# Altium PCB PCB1_DEC24.pcbdoc (part 2 of 2)
Units mil, origin at the board's own origin, x right, y up, seen from the top; angles counter-clockwise.
Board outline 3300 x 2250 mil, 2 copper layers (Top Layer, Bottom Layer); 80 components, 60 nets, 287 pads, 191 vias.
Unrouted connection lines stored in the file: 6.
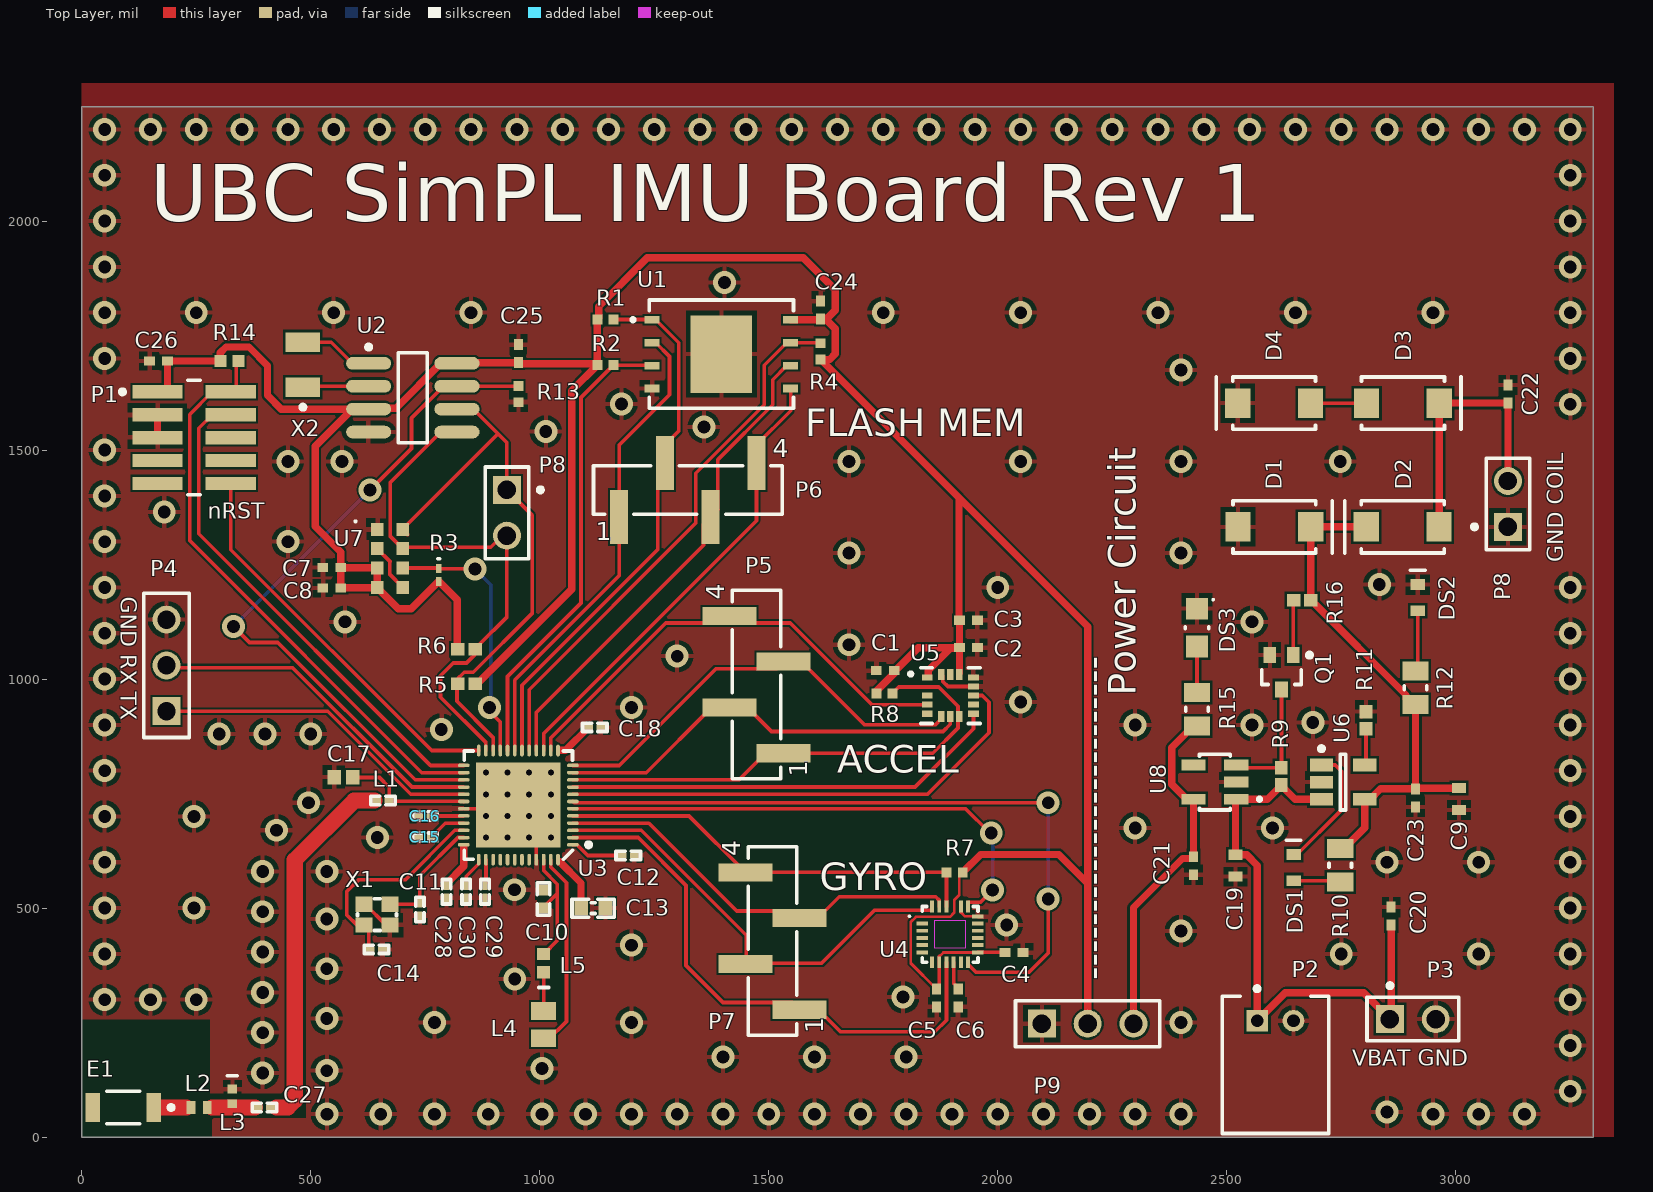
[diagram p0: Top Layer view]

## Via types
v1: diameter 50, hole 28, Top Layer to Bottom Layer, 175 vias
v2: diameter 25.98, hole 12.99, Top Layer to Bottom Layer, 16 vias

## Nets (pads, with @x,y where several pads share a name; then routed paths per layer and width w, separated by ;. In a path a pad name is that pad's centre, name@x,y a point inside that pad or via, vN(x,y) a via of type N, cw(c..) or ccw(c..) an arc to the next point about the centre after c; other vN are vias at no path point) (continued)
I2C_SDA: (continued)
  Top Layer w8: U7.7@700.34,1285.23 673.22,1312.35 673.22,1428.91 U2.5@783.75,1539.44 ; U7.7@700.44,1285.23 U7.7 U7.7@703.68,1287.98 ; U7.7@703.59,1287.98 U7.7@703.68,1287.98 ; 783.22,960.54 882.35,861.41 U3.23 ; 783.31,960.54 783.31,1007 811.31,1035 840,1035 858.7,1053.7 R6.1 ; U2.5@783.84,1539.44 U2.5 U2.5@819.28,1539.44 ; R6.1@867.01,1074.42 928.22,1135.63 928.22,1313.04 918.23,1313.04 893.16,1287.98 U7.7@703.68,1287.98
IR_INT: R3.1 U3.21 U7.6 | length 578.3
  Top Layer w8: U7.6@700.34,1242.41 U7.6 R3.1@777.98,1242.41 ; R3.1@778.07,1242.41 R3.1 ; R3.1@779.38,1241.01 R3.1 ; v1@857.75,1241.01 R3.1 ; v1@857.84,1241.01 v1@858.31,1240.54 ; v1@893.22,926.98 v1@893.22,938.04 ; v1@893.31,926.98 913.94,906.35 ; U3.21 913.85,906.35
  Bottom Layer w8: v1(858.22,1240.54) 893.22,1205.54 v1@893.22,938.04
  other v1: 890,938.04
MEM_CS: P6.2 R1.1 U1.1 U3.18 | length 1165.3
  Top Layer w8: U3.18 961.09,986.64 1257.53,1283.08 P6.2@1257.53,1456.41 ; R1.1@1160.93,1785.54 1161.45,1785.03 1244.49,1785.03 U1.1 ; U1.1@1253.27,1784.52 1303.22,1734.57 1303.22,1541.47 ; P6.2 P6.2@1273.22,1511.47 ; P6.2@1273.31,1511.47 1303.31,1541.47
MEM_MISO: P6.4 U1.5 U3.15 | length 1022.3
  Top Layer w8: U3.15 1008.34,880.66 1473.22,1345.54 P6.4 1473.22,1511.47 1547.76,1586.01 ; U1.5@1539.58,1634.52 1547.85,1634.52 1547.85,1586.01
MEM_MOSI: P6.1 U1.2 U3.19 | length 1051.2
  Top Layer w8: U3.19 945.34,997.77 1173.22,1225.64 P6.1 1173.22,1510.54 1283.22,1620.54 1283.22,1704.57 1253.27,1734.52 U1.2
MEM_SCLK: P6.3 U1.6 U3.16 | length 1075.4
  Top Layer w8: U3.16 992.59,927.41 1357.53,1292.36 P6.3@1357.53,1338.3 ; P6.3@1357.63,1338.3 P6.3@1389,1369.67 ; P6.3@1388.9,1369.67 1388.9,1479.25 1508.39,1598.73 1508.39,1653.42 U1.6@1539.49,1684.52 ; U1.6@1539.58,1684.52 U1.6 U1.6@1547.85,1684.52
MEM_SPI_HOLD: R4.1 U1.7 U3.17 | length 1197.4
  Top Layer w8: U3.17 976.84,976.84 1340.77,1340.77 1340.77,1449.5 1490,1598.73 1490,1685.03 1539.49,1734.52 U1.7 R4.1@1613.22,1734.52
MEM_SPI_W: R2.1 U1.3 U3.20 | length 1021.9
  Top Layer w8: U3.20 929.6,1005.49 1090.02,1165.92 1090.02,1614.63 1160.93,1685.54 1161.45,1685.03 1244.49,1685.03 U1.3
NetC6_1: C6.1 U4.10 | length 62.8
  Top Layer w8: 1903.59,335.13 U4.10@1903.59,381.78 ; 1903.69,335.13 1913.69,325.13 C6.1
NetC17_2: C17.2 L1.1 U3.30 | length 283.2
  Top Layer w8: C17.2@591.31,785 650.04,785 671.08,763.96 L1.1@671.08,734.85 ; L1.1@671.18,733.09 L1.1@672.94,733.09 ; L1.1 L1.1@672.94,733.09 ; U3.30@833.76,733.09 L1.1@672.94,733.09 ; U3.30@833.86,733.09 U3.30@834.22,732.73
NetC27_1: C27.1 L2.1 L3.2 | length 94.8
  Top Layer w8: L2.1 L2.1@274.18,64.65
  Top Layer w35: 284.12,64.65 C27.1@378.68,64.65
NetC29_2: C29.2 U3.38 | length 57.3
  Top Layer w8: C29.2 880.31,553.26 882.45,555.39 U3.38
NetC30_2: C30.2 U3.37 | length 67.8
  Top Layer w8: C30.2 839.22,569.64 U3.37@866.6,597.03 ; U3.37@866.7,597.03 U3.37@866.7,605.76
NetD3_1: D3.1 D4.1 | length 122.7
  Top Layer w8: D4.1 D3.1
NetDS1_1: DS1.1 R10.1 | length 103.2
  Top Layer w8: DS1.1 2744.94,559.88 R10.1
NetDS1_2: DS1.2 U6.1 | length 289.3
  Top Layer w8: DS1.2@2649.47,613.3 2751.32,715.15 2751.32,797.93 2736.82,812.43 2706.85,812.43 U6.1 U6.1@2718.54,812.54
NetDS2_1: DS2.1 R12.1 | length 134.3
  Top Layer w8: R12.1@2917.01,1017.44 DS2.1 DS2.1@2918.82,1151.04
NetDS3_2: DS3.2 R15.1 | length 100.8
  Top Layer w8: R15.1 DS3.2
NetE1_1: E1.1 L2.2 | length 69.1
  Top Layer w35: E1.1@159.54,64.5 228.68,64.5
NetL4_1: L4.1 U3.47 | length 426.9
  Top Layer w8: L4.1@1016.21,210.41 1058.22,252.41 1058.22,555.54 ; U3.47@1024.18,605.76 1024.18,589.68 1058.31,555.54
NetL4_2: L4.2 L5.1 | length 90.1
  Top Layer w8: L4.2@1008.34,269.85 L5.1
NetQ1_1: Q1.1 R16.1 | length 120.4
  Top Layer w8: Q1.1 2645.1,1171.72 R16.1
NetQ1_3: Q1.3 R9.1 U8.3 | length 272.6
  Top Layer w8: U8.3 2527.05,806.13 R9.1 2619.51,806.66 Q1.3
NetR11_2: R11.2 U6.5 | length 80
  Top Layer w8: U6.5 2803.97,815.3 R11.2
NetU2_1: U2.1 X2.2 | length 162.7
  Top Layer w8: X2.2 544.69,1735.58 590.84,1689.44 U2.1
NetU2_2: U2.2 X2.1 | length 144.5
  Top Layer w8: X2.1@482.82,1637.16 X2.1@485.1,1639.44 ; X2.1@485.01,1639.44 U2.2
nRESET: P1.10 U3.24 | length 867.4
  Top Layer w8: P1.10 325.48,1282.59 764.12,843.95 U3.24
P0.27: U3.39
P0.28/AIN4: U3.40
RF: C27.2 L1.2 | length 798.8
  Top Layer w35: 425,65 450,65 465,80 465,605 594.85,734.85 L1.2@638.83,734.85
RST_CLK: R13.2 U2.7 U3.27 | length 1519.2
  Top Layer w8: v1(331.31,1114.82) 366.14,1080 428.04,1080 728.07,779.97 U3.27 ; v1(629.53,1413.04) 720,1503.51 720,1569.86 U2.7@789.58,1639.44 ; U2.7@789.68,1639.44 U2.7 R13.2@952.29,1639.44 ; R13.2@952.39,1639.44 R13.2@952.82,1639.87
  Bottom Layer w8: v1(331.31,1114.82) v1(629.53,1413.04)
RX: P4.2 U3.28 | length 757.1
  Top Layer w8: P4.2@185,1025 460.25,1025 721.03,764.22 U3.28
SWDCLK: P1.4 U3.25 | length 1100.5
  Top Layer w8: 255.48,1547.5 255.48,1317.59 761.6,811.47 U3.25 ; 255.58,1547.5 P1.4@285.22,1577.15 ; P1.4@285.13,1577.15 P1.4@285.22,1577.15 ; P1.4 P1.4@285.22,1577.15
SWDIO: P1.2 R14.1 U3.26 | length 1261.4
  Top Layer w8: P1.2@337.05,1638.72 P1.2 285.13,1627.15 235.48,1577.5 235.48,1302.59 742.35,795.72 U3.26 ; P1.2@337.15,1638.72 R14.1@337.15,1689.7
TX: P4.1 U3.29 | length 735.7
  Top Layer w8: P4.1@173.58,929.85 P4.1 537.02,929.85 718.39,748.48 U3.29
VBAT: C19.2 C20.1 P2.1 P3.1 R9.2 U6.3 U8.1 | length 1274.3
  Top Layer w16: U6.3 2648.98,737.74 2618.97,767.74 2588.97,737.74 U8.1 2518.97,736.09 C19.2 2543.44,616.56 2566.85,593.15 P2.1 2627.85,315 2798.76,315 P3.1 2858.97,260.3 C20.1
VBUS: C9.2 C23.1 D1.2 D2.2 R10.2 R12.2 R16.2 U6.4 | length 1144.1
  Top Layer w16: R10.2 2755.69,629.84 2801.22,675.37 U6.4 2813.03,737.74 2835.59,760.3 C23.1 ; D2.2 D1.2 2683.21,1332.33 R16.2 2684.19,1172.43 2891.46,965.15 2891.46,957.28 2904.13,944.61 R12.2 C23.1 ; C9.2 3005.94,761.36 2913.07,761.36 C23.1
XC1: C14.2 U3.34 X1.1 | length 467.4
  Top Layer w8: C14.2@626.53,412.76 626.53,452.56 X1.1 600.8,462.96 578.22,485.54 578.22,535.54 604.22,561.54 706.22,561.54 814.41,669.74 ; C14.2@626.63,412.76 C14.2 ; 814.51,669.74 U3.34@834.22,669.74
XC2: C11.2 U3.35 X1.3 | length 256.3
  Top Layer w8: X1.3 C11.2@735.66,508.24 ; C11.2@735.75,508.24 C11.2 ; C11.2@738.22,510.8 738.22,570.6 U3.35@821.6,653.99 ; U3.35@821.7,653.99 U3.35@834.22,653.99
pads on no net: E1.2 P1.6 P1.7 P1.8 P1.9 U3.41 U3.42 U3.43 U3.44 U4.1 U4.2 U4.3 U4.4 U4.5 U4.6 U4.7 U4.11 U4.14 U4.15 U4.16 U4.17 U4.21 U5.2 U5.3 U5.5 U5.10 U5.15 U8.4
copper on no net:
  other v2: 882.35,653.99 929.6,653.99 976.84,653.99 1024.08,653.99 882.35,701.23 929.6,701.23 976.84,701.23 1024.08,701.23 882.35,748.48 929.6,748.48 976.84,748.48 1024.08,748.48 882.35,795.72 929.6,795.72 976.84,795.72 1024.08,795.72

## Polygon pours and split planes (outlines as drawn)
GND on Bottom Layer "Bottom Layer-GND" (solid, remove dead copper, pour order 22): 0,0 3315,0 3315,2360 0,2360
GND on Top Layer "Top Layer-GND" (solid, remove dead copper, pour order 32): 0,256.87 280,256.87 280,95.97 435,95.97 450,110.97 450,256.87 450,620.97 605,740.97 490,611.59 490,40.97 285,40.97 285,0.97 3345,0.97 3345,2300.97 0,2300.97

## Silkscreen, mask and mechanical layers (free items; w line width, h text height)
Top Overlay:
  text "UBC SimPL IMU Board Rev 1" at 150,2000 h125
  text "FLASH MEM" at 1580,1530 h60
  text "nRST" at 275.48,1350.54 h35
  text "GND COIL" at 3235,1255 h35 r90
  text "GND RX TX" at 85,1180 h35 r270
  text "Power Circuit" at 2301.22,963.54 h60 r90
  text "ACCEL" at 1650,795.72 h60
  text "GYRO" at 1611.22,539.22 h60
  text "------------------------" at 2237.22,342.54 h60 r90
  text "VBAT GND" at 2773.82,155.43 h35

## Text inside footprints (layer, text, board x,y; h text height)
P5: Top Overlay "4" at 1402.35,1173.08 h40 r90; Top Overlay "1" at 1583.45,787.26 h40 r90
P6: Top Overlay "4" at 1508.26,1483.91 h40; Top Overlay "1" at 1122.43,1302.81 h40
P7: Top Overlay "1" at 1618.45,227.26 h40 r90; Top Overlay "4" at 1437.35,613.08 h40 r90